# Altium PCB 2x3.PcbDoc
Units mil, origin at the board's own origin, x right, y up, seen from the top; angles counter-clockwise.
Board outline 3000 x 2000 mil, 2 copper layers (Top Layer, Bottom Layer); 32 components, 64 nets, 240 pads, 12 vias.
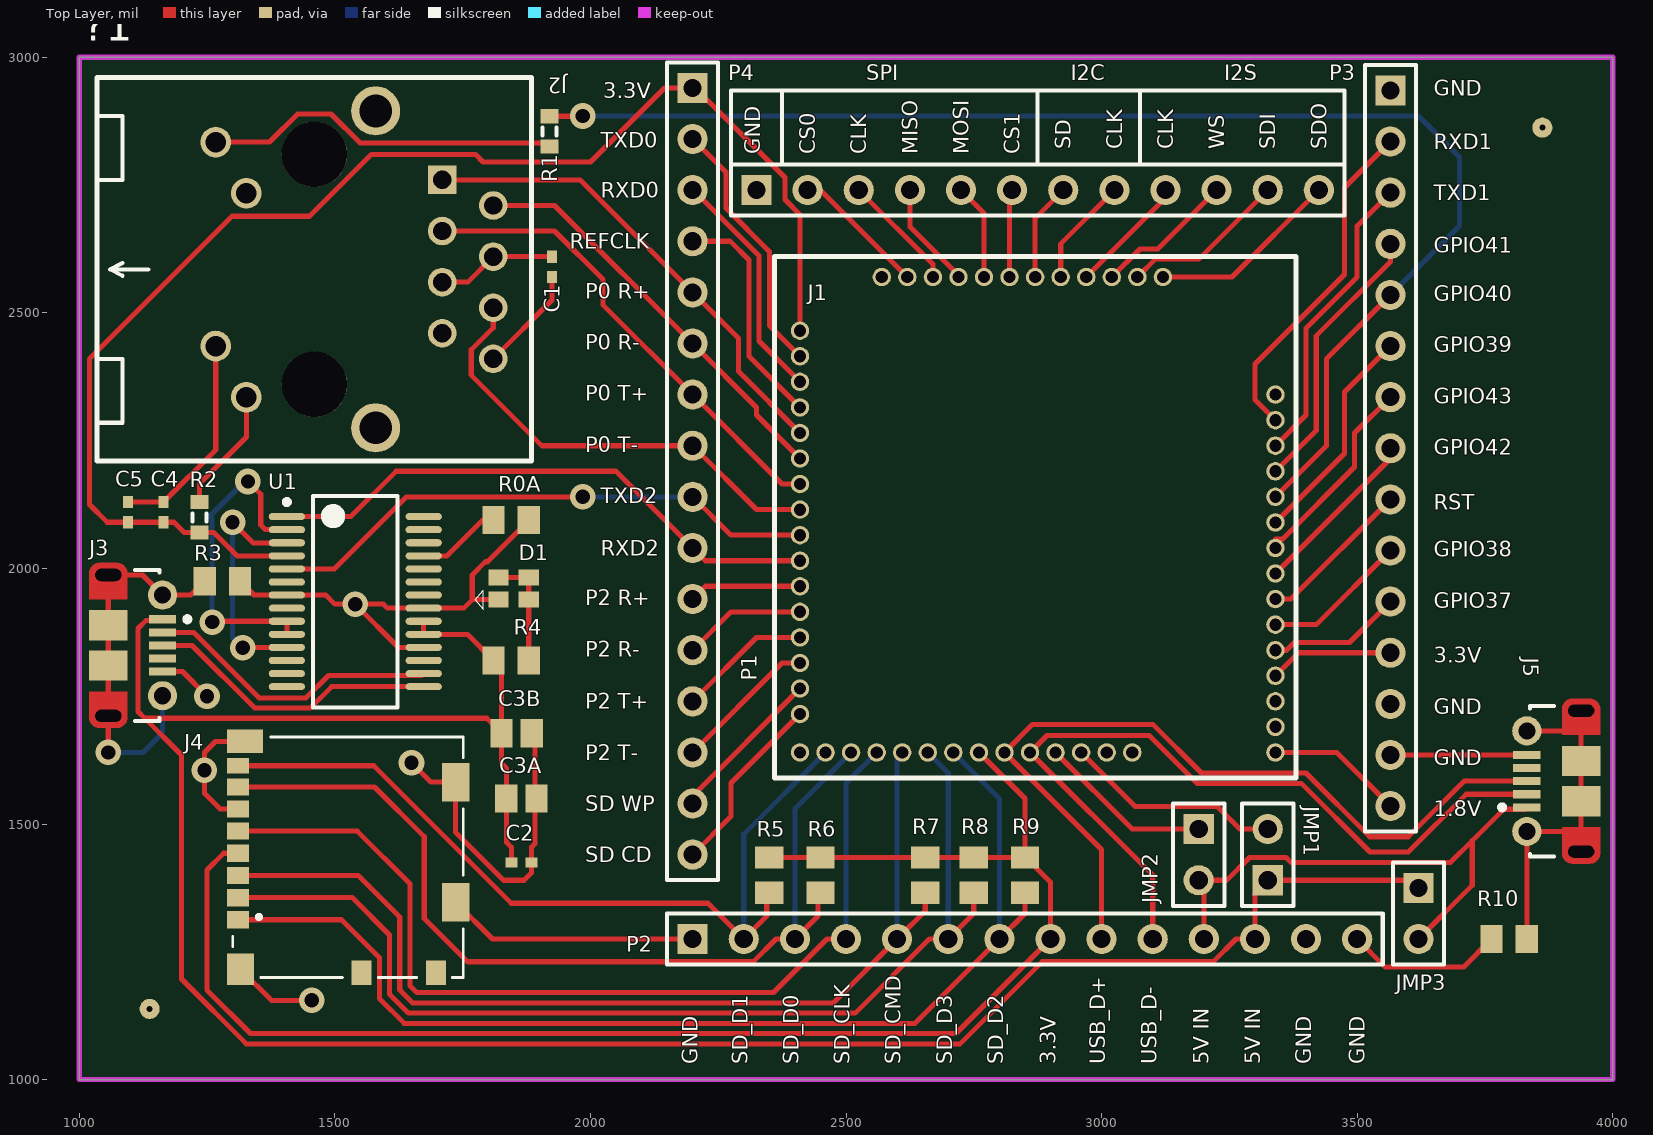
[diagram p0: Top Layer view]
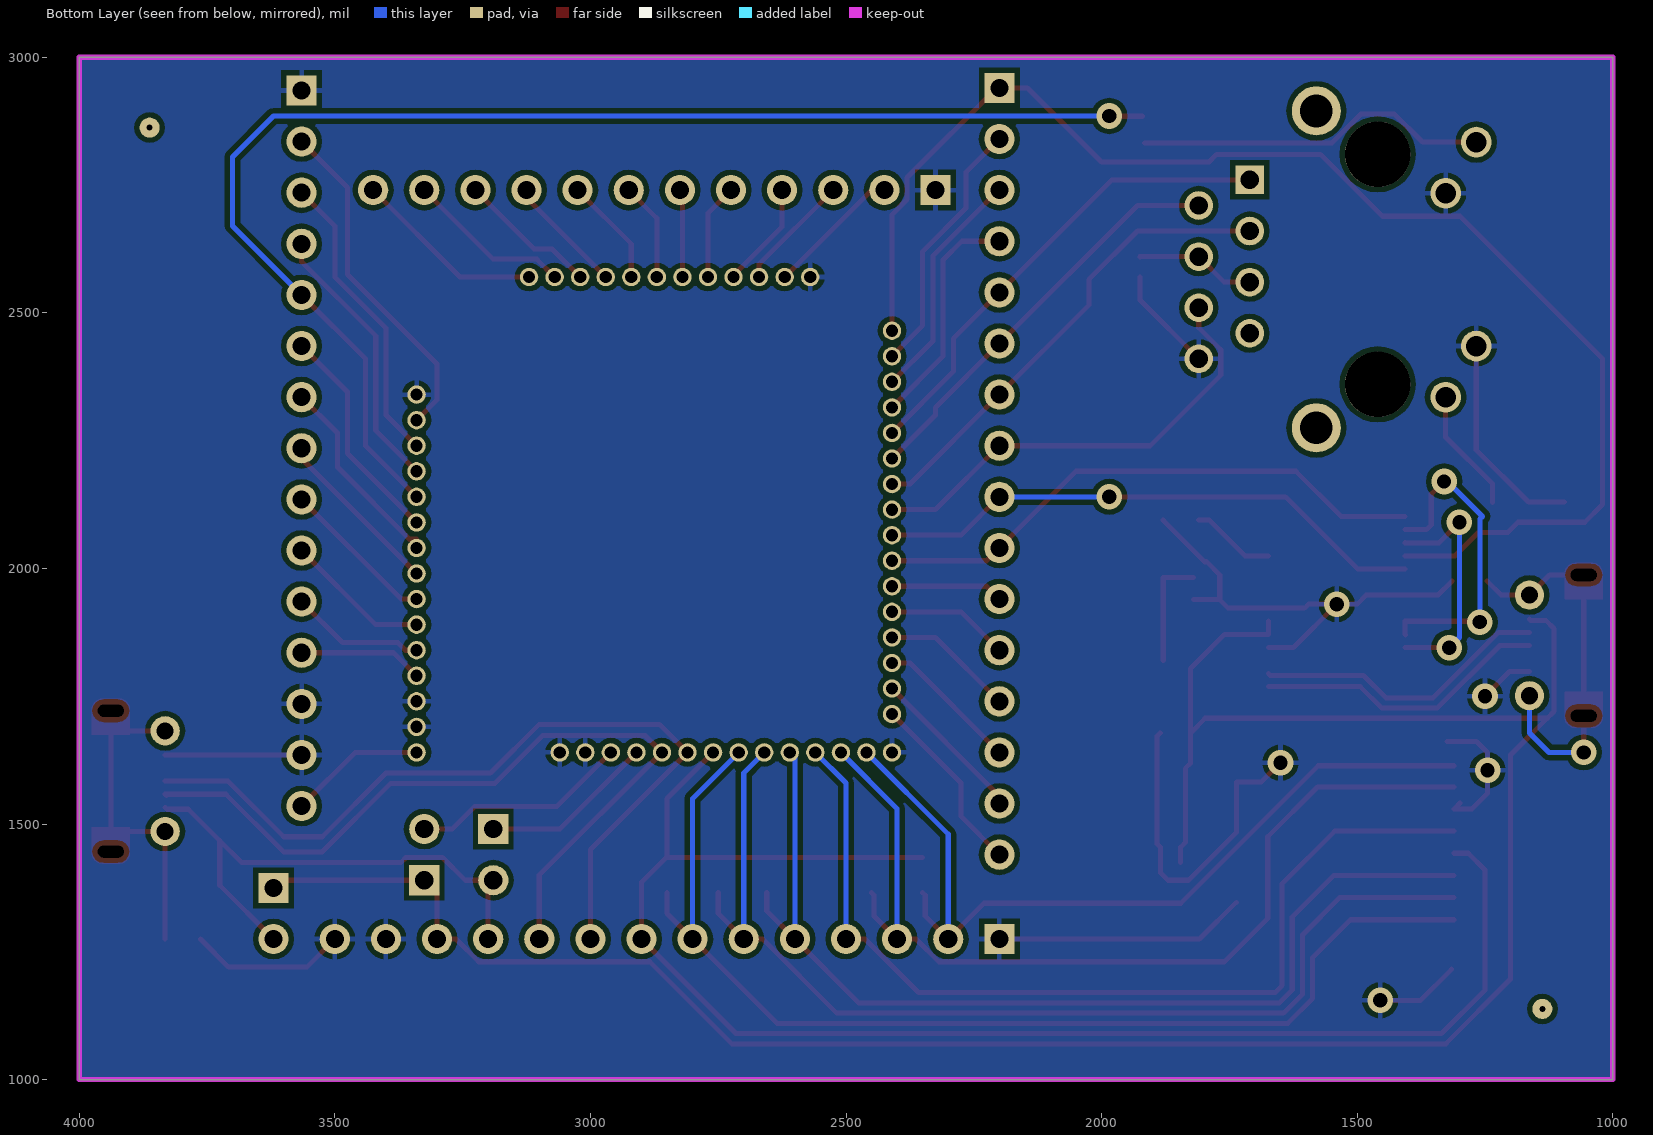
[diagram p1: Bottom Layer view, seen from below]

## Layer stack, top to bottom
Top Solder: solder mask 0.4, Solder Resist, Dk 3.5
Top Layer: signal copper 1.4
Dielectric 1: dielectric 12.6, FR-4, Dk 4.8
Bottom Layer: signal copper 1.4
Bottom Solder: solder mask 0.4, Solder Resist, Dk 3.5

## Board outline
1000,1000 1000,3000 4000,3000 4000,1000

## Design rules (kind name [scope] priority, off if disabled: settings)
Clearance [All] p1: gap=10 ignorepadtopadclearanceinfootprint=TRUE except(0: Arc-Hole Track-Hole SMDPad-Hole THPad-Hole Via-Hole Fill-Hole Poly-Hole Region-Hole Text-Hole; 20: Arc-Arc)
HoleSize [All] p1: absolutevalues=TRUE maxlimit=130 minlimit=1 maxpercent=80.000 minpercent=20.000
MinimumSolderMaskSliver "Inter Componetn_MinimumSolderMaskSliver" [(InComponent('U1') OR InComponent('J1') OR InComponent('J3') OR InComponent('D1') OR InComponent('J4') OR InComponent('J5') OR InComponent('C1') OR InComponent('C2') OR InComponent('C3A') OR InComponent('C3B') OR InComponent('C4') OR InComponent('C5')) vs (InComponent('U1') OR InComponent('J1') OR InComponent('J3') OR InComponent('D1') OR InComponent('J4') OR InComponent('J5') OR InComponent('C1') OR InComponent('C2') OR InComponent('C3A') OR InComponent('C3B') OR InComponent('C4') OR InComponent('C5'))] p1: minsoldermaskwidth=1
MinimumSolderMaskSliver [All] p2: minsoldermaskwidth=10
PolygonConnect [All] p1: connectstyle=Relief reliefconductorwidth=10 reliefentries=4 polygonreliefangle="90 Angle" airgapwidth=10
RoutingVias [All] p1: holewidth=28 width=50 viastyle="Through Hole" minholewidth=28 minwidth=50 maxholewidth=28 maxwidth=50
SilkToSolderMaskClearance SilkToSolderMaskClearance_1 [(InComponent('R1') OR InComponent('R2') OR InComponent('R3') OR InComponent('R4') OR InComponent('R5') OR InComponent('R6') OR InComponent('R7') OR InComponent('R8') OR InComponent('R9') OR InComponent('R10') OR InComponent('R0A') OR InComponent('D1') OR InComponent('J4')) vs (InComponent('R1') OR InComponent('R2') OR InComponent('R3') OR InComponent('R4') OR InComponent('R5') OR InComponent('R6') OR InComponent('R7') OR InComponent('R8') OR InComponent('R9') OR InComponent('R10') OR InComponent('R0A') OR InComponent('D1') OR InComponent('J4'))] p1: minsilkscreentomaskgap=3 clearancetoexposedcopper=TRUE
SilkToSolderMaskClearance [IsPad] p2: minsilkscreentomaskgap=10 clearancetoexposedcopper=TRUE
SolderMaskExpansion [All] p1: expansion=4
Width [All] p1: maxlimit=10 minlimit=10 preferedwidth=10
27 further rules are at their usual default settings.

## Components (designator, comment, footprint, x,y, rotation, side; value= is the part's Value field where it differs from the comment)
?1 "2X3_BOARD" 2X3_BOARD 1000,1000 r0 top locked
C1 "100nF" 0402 1925,2590 r270 top
C2 "100nF" 0402 1865,1425 r180 top
C3A "4.7uF" C0805 1865,1550 r0 top
C3B "4.7uF" C0805 1855.83,1677.66 r0 top
C4 "10nF" 0402 1165,2110 r270 top
C5 "100nF" 0402 1095,2110 r270 top
D1 "LED2" PLCC4-2MM-RGB 1849.92,1960.54 r180 top
J1 "Vocore2  Mount" "Vocore2_Mount_One_Row_ No_Labels" 2410,1596 r0 top
J2 "J0011D01BNL" J00-00XXNL_J00-0061NL(Primary) 1460,2585 r90 top
J3 "105017-0001" USB-MICRO-B_V#1 1110,1849.37 r270 top
J4 "104031-0811" MOLEX_104031-0811_104031-0811(Primary) 1515,1435 r270 top
J5 "105017-0001" USB-MICRO-B_V#2 3885,1583.82 r90 top
JMP1 "Header 2" HDR1X2 3325,1390 r90 top
JMP2 "Header 2" HDR1X2 3190,1490 r270 top
JMP3 "Header 2" HDR1X2 3620,1375 r270 top
P1 "Header 16" HDR1X16 2200,2940 r270 top
P2 "Header 14" HDR1X14 2200,1275 r0 top
P3 "Header 15" HDR1X15 3565,2935 r270 top
P4 "Header 12" HDR1X12 2325,2740 r0 top
R0A "0" RESC2013X06N 1845,2095 r180 top
R1 "330" J1-0603 1920,2855 r270 top
R2 "330" J1-0603 1235,2100 r90 top
R3 "100" RESC2013X06N 1280,1975 r0 top
R4 "100" RESC2013X06N 1845,1820.05 r0 top
R5 "10K" RESC2012X07N_0805 2350,1400 r90 top
R6 "10K" RESC2012X07N_0805 2450,1400 r90 top
R7 "10K" RESC2012X07N_0805 2655,1400 r90 top
R8 "10K" RESC2012X07N_0805 2750,1400 r90 top
R9 "10K" RESC2012X07N_0805 2850,1400 r90 top
R10 "100" RESC2013X06N 3797.4,1275 r180 top
U1 "FT232RL-Reel" SSOP-28_L 1540,1935 r0 top

## Footprints (in the part's own frame and the unit in brackets; to place one, negate y for a bottom-side part, rotate by r counter-clockwise, add the part's x,y. Pads: shape width x height; smd on the part's side, far side on the other; paste and mask are expansions set on the pad)
2X3_BOARD [mm]
  round 1 / inner round 1.524 / far side round 1 hole 0.3: P$1(3.5,3.51) P$2(72.7,47.3)
0402 [mm] "Chip Capacitor, Body 1.0x0.5mm, IPC High Density"
  rect 0.6x0.5 smd: 1(-0.5,0) 2(0.5,0)
  body extent -0.55,-0.3 0.55,0.3, height 1.3
C0805 [mm] "Chip Capacitor, Body 2.0x1.3mm, IPC High Density"
  rect 1.1x1.4 smd: 1(-0.75,0) 2(0.75,0)
  body extent -1.1,-0.72 1.1,0.72, height 1.4
HDR1X2 [mm] "Connector; Header; 2 Position"
  rect 1.5x1.5 hole 0.9: 1(0,0)
  round 1.5 hole 0.9: 2(2.54,0)
  silkscreen extent -1.27,-1.27 3.81,1.27
HDR1X12 [mm] "Connector; Header; 12 Position"
  rect 1.5x1.5 hole 0.9: 1(0,0)
  round 1.5 hole 0.9: 2(2.54,0) 3(5.08,0) 4(7.62,0) 5(10.16,0) 6(12.7,0) 7(15.24,0) 8(17.78,0) 9(20.32,0) 10(22.86,0) 11(25.4,0) 12(27.94,0)
  silkscreen extent -1.27,-1.27 29.21,1.27
HDR1X14 [mm] "Connector; Header; 14 Position"
  rect 1.5x1.5 hole 0.9: 1(0,0)
  round 1.5 hole 0.9: 2(2.54,0) 3(5.08,0) 4(7.62,0) 5(10.16,0) 6(12.7,0) 7(15.24,0) 8(17.78,0) 9(20.32,0) 10(22.86,0) 11(25.4,0) 12(27.94,0) 13(30.48,0) 14(33.02,0)
  silkscreen extent -1.27,-1.27 34.29,1.27
HDR1X15 [mm] "Connector; Header; 15 Position"
  rect 1.5x1.5 hole 0.9: 1(0,0)
  round 1.5 hole 0.9: 2(2.54,0) 3(5.08,0) 4(7.62,0) 5(10.16,0) 6(12.7,0) 7(15.24,0) 8(17.78,0) 9(20.32,0) 10(22.86,0) 11(25.4,0) 12(27.94,0) 13(30.48,0) 14(33.02,0) 15(35.56,0)
  silkscreen extent -1.27,-1.27 36.83,1.27
HDR1X16 [mm] "Connector; Header; 16 Position"
  rect 1.5x1.5 hole 0.9: 1(0,0)
  round 1.5 hole 0.9: 2(2.54,0) 3(5.08,0) 4(7.62,0) 5(10.16,0) 6(12.7,0) 7(15.24,0) 8(17.78,0) 9(20.32,0) 10(22.86,0) 11(25.4,0) 12(27.94,0) 13(30.48,0) 14(33.02,0) 15(35.56,0) 16(38.1,0)
  silkscreen extent -1.27,-1.27 39.37,1.27
J00-00XXNL_J00-0061NL(Primary) [mil]
  rect 56x56 hole 36: 1(175,-250)
  round 56 hole 36: 2(125,-350) 3(75,-250) 4(25,-350) 5(-25,-250) 6(-75,-350) 7(-125,-250) 8(-175,-350)
  round 60 hole 40: 9(249,193) 10(149,133) 11(-150,193) 12(-250,133)
  round 128 hole 128 unplated: None(-225,0) None(225,0)
  round 96 hole 64: S1(-310,-120) S2(310,-120)
  silkscreen extent -375,-425 375,425
J1-0603 [mm] "Chip Resistor, Body 1.6x0.8mm, IPC High Density"
  rect 0.7x0.9 smd: 1(-0.75,0) 2(0.75,0)
  silkscreen extent -0.2,-0.35 0.2,0.35, body extent -0.85,-0.48 0.85,0.48, height 0.9
MOLEX_104031-0811_104031-0811(Primary) [mm]
  rect 0.85x1.1 smd: 1(3.105,-5.2) 3(0.905,-5.2) 4(-0.195,-5.2) 5(-1.295,-5.2) 6(-2.395,-5.2) 7(-3.495,-5.2)
  rect 0.875x1.1 smd: 2(2.005,-5.2)
  rect 0.75x1.1 smd: 8(-4.545,-5.2)
  rect 1.2x1 smd: 9(5.74,0.95) 10(5.74,4.65)
  rect 1.55x1.35 smd: G1(5.565,-5.075)
  rect 1.17x1.8 smd: G2(-5.755,-4.85)
  rect 1.9x1.35 smd: G3(-3.73,5.625) G4(2.24,5.625)
  silkscreen extent -5.97,-5.45 5.97,6
PLCC4-2MM-RGB [mm]
  rect 1x0.8 smd: 1(-0.75,0.55) 1(-0.75,-0.55) 1(0.75,-0.55) 2(0.75,0.55)
  silkscreen extent 1.52,0.08 1.91,1.02
RESC2012X07N_0805 [mm] "Chip Resistor, 2-Leads, Body 2.00x1.22mm, IPC Medium Density"
  rect 1.1x1.4 smd: 1(-0.875,0) 2(0.875,0)
  body extent -1.07,-0.7 1.08,0.7, height 0.65
RESC2013X06N [mm] "Chip Resistor, 2-Leads, Body 2.00x1.27mm, IPC Medium Density"
  rect 1.1x1.4 smd: 1(-0.875,0) 2(0.875,0)
  body extent -1.07,-0.7 1.08,0.7, height 0.65
SSOP-28_L [mm] "SOP, 28-Leads, Body 10.2x5.3mm, Pitch 0.65mm, IPC High Density"
  oval 1.8x0.35 smd: 1(-3.4,4.225) 2(-3.4,3.575) 3(-3.4,2.925) 4(-3.4,2.275) 5(-3.4,1.625) 6(-3.4,0.975) 7(-3.4,0.325) 8(-3.4,-0.325) 9(-3.4,-0.975) 10(-3.4,-1.625) 11(-3.4,-2.275) 12(-3.4,-2.925) 13(-3.4,-3.575) 14(-3.4,-4.225) 15(3.4,-4.225) 16(3.4,-3.575) 17(3.4,-2.925) 18(3.4,-2.275) 19(3.4,-1.625) 20(3.4,-0.975) 21(3.4,-0.325) 22(3.4,0.325) 23(3.4,0.975) 24(3.4,1.625) 25(3.4,2.275) 26(3.4,2.925) 27(3.4,3.575) 28(3.4,4.225)
  silkscreen extent -3.52,-5.25 2.1,5.25, body extent -2.8,-5.25 2.8,5.25, height 2
USB-MICRO-B_V#1 [mm] "USB, MICRO B, Body 7.491x4.695 mm, Pitch 0.65 mm"
  rect 0.4x1.35 smd: 1(-1.3,1.35) 2(-0.65,1.35) 3(0,1.35) 4(0.65,1.35) 5(1.3,1.35)
  round 1.45 hole 0.85: 6(-2.5,1.35) 7(2.5,1.35)
  rrect50% 0x0 hole 0.6 slot 1.3 at 90 deg: 8(-3.5,-1.35) 11(3.5,-1.35)
  rect 1.5x1.9 smd: 9(-1,-1.35) 10(1,-1.35)
  Top Layer circle w0.5: c-3.6,-1.8 r0.25
  Top Layer circle w0.5: c3.6,-1.8 r0.25
  Top Layer region: -3.6,-1.8 -3.6,-0.9 -4.1,-0.9 -4.1,-1.8
  Top Layer region: 3.6,-0.9 3.6,-1.8 4.1,-1.8 4.1,-0.9
  Top Layer region: 2.3,-0.4 2.3,-2.3 3.6,-2.3 3.6,-0.4
  Top Layer region: -2.3,-2.3 -2.3,-0.4 -3.6,-0.4 -3.6,-2.3
  Top Layer lines w0.5: 3.546,-1.144 cw(c3.6,-0.9) 3.5,-1.129 cw(c3.6,-0.9) 3.5,-0.671 cw(c3.6,-0.9) 3.6,-0.65 cw(c3.6,-0.9) 3.546,-1.144 ; -3.5,-1.129 ccw(c-3.6,-0.9) -3.5,-0.671 ccw(c-3.6,-0.9) -3.6,-0.65 ccw(c-3.6,-0.9) -3.5,-1.129
  silkscreen extent -3.75,-0.01 3.75,2.7, body extent -4.1,-3.9 4.1,1.5, height 2.67
USB-MICRO-B_V#2 [mm] "USB, MICRO B, Body 7.491x4.695 mm, Pitch 0.65 mm"
  rect 0.4x1.35 smd: 1(-1.3,1.35) 2(-0.65,1.35) 3(0,1.35) 4(0.65,1.35) 5(1.3,1.35)
  round 1.45 hole 0.85: 6(-2.5,1.35) 7(2.5,1.35)
  rrect50% 0x0 hole 0.6 slot 1.3 at 90 deg: 8(-3.5,-1.35) 11(3.5,-1.35)
  rect 1.5x1.9 smd: 9(-1,-1.35) 10(1,-1.35)
  Top Layer circle w0.5: c-3.6,-1.8 r0.25
  Top Layer circle w0.5: c-3.6,-0.9 r0.25
  Top Layer circle w0.5: c3.6,-0.9 r0.25
  Top Layer region: -3.6,-1.8 -3.6,-0.9 -4.1,-0.9 -4.1,-1.8
  Top Layer region: 3.6,-0.9 3.6,-1.8 4.1,-1.8 4.1,-0.9
  Top Layer region: 2.3,-0.4 2.3,-2.3 3.6,-2.3 3.6,-0.4
  Top Layer region: -2.3,-2.3 -2.3,-0.4 -3.6,-0.4 -3.6,-2.3
  Top Layer lines w0.5: 3.546,-1.556 ccw(c3.6,-1.8) 3.6,-2.05 ccw(c3.6,-1.8) 3.546,-1.556
  silkscreen extent -3.75,-0.01 3.75,2.7, body extent -4.1,-3.9 4.1,1.5, height 2.67
"Vocore2_Mount_One_Row_ No_Labels" [mil]
  round 36 hole 24: 1(0,869) 2(0,819) 3(0,769) 4(0,719) 5(0,669) 6(0,619) 7(0,569) 8(0,519) 9(0,469) 10(0,419) 11(0,369) 12(0,319) 13(0,269) 14(0,219) 15(0,169) 16(0,119) 17(0,44) 18(50,44) 19(100,44) 20(150,44) 21(200,44) 22(250,44) 23(300,44) 24(350,44) 25(400,44) 26(450,44) 27(500,44) 28(550,44) 29(600,44) 30(650,44) 31(930,44) 32(930,94) 33(930,144) 34(930,194) 35(930,244) 36(930,294) 37(930,344) 38(930,394) 39(930,444) 40(930,494) 41(930,544) 42(930,594) 43(930,644) 44(930,694) 45(930,744) 46(710,974) 47(660,974) 48(610,974) 49(560,974) 50(510,974) 51(460,974) 52(410,974) 53(360,974) 54(310,974) 55(260,974) 56(210,974) 57(160,974)

## Part data
C1 C2 C4 C5: library part "Cap Semi", "Capacitor (Semiconductor SIM Model)", LatestRevisionDate=29-May-2009, LatestRevisionNote="IPC-7351 Footprint Added.", PackageDescription="Chip Capacitor", PackageReference=C1206, Published=8-Jun-2000, Publisher="Altium Limited"
C3A C3B: library part CMP-1036-04922-1, "CAP CER 4.7UF 6.3V X5R 0603", Manufacturer=Yageo, Manufacturer Part Number=CC0603KRX5R5BB475, Part Number=311-1521-1-ND, Supplier=Digikey, URL=https://www.digikey.com/short/q3j4jd
D1: "Typical RED, GREEN, YELLOW, AMBER GaAs LED", LatestRevisionDate=17-Jul-2002, LatestRevisionNote="Re-released for DXP Platform.", PackageDescription="SM LED; 2 Flat Leads", PackageReference=3.2X1.6X1.1, PackageVersion=Feb-2002, Published=8-Jun-2000, Publisher="Altium Limited"
J1: library part Vocore2_Pins
J2: "CONN MAGJACK 1PORT 100 BASE-TX", Manufacturer="Pulse Electronics Network", Supplier Part Number 1=553-1483-ND, Manufacturer Part Number=J0011D01BNL, Supplier 1=Digi-Key, URL=https://www.digikey.com/short/q8f3j9
J3 J5: library part CMP-2000-05827-1, "Micro-USB B Receptacle, Right Angle, Bottom Mount, Surface Mount, with Solder Tabs, -30 to 85 degC, 5-Pin USB, RoHS, Tape and Reel", Manufacturer=Molex, Package Description="5-Leads USB, Micro B, Body 7.5 x 5 mm, Pitch 0.65 mm", Package Reference=MICRO-B, Package Version="Rev. F, 12/2012", Standard Package=1, Voltage - Max=30V, 3D Model=105017-0001.stp, Catalog Drawings=1050170001, Category=Connectors,Interconnects, Circuits=5, Connector Type=USB-microB, Datasheet URL=http://www.molex.com/elqNow/elqRedir.htm?ref=http://www.molex.com/webdocs/datasheets/pdf/en-us/1050170001_IO_CONNECTORS.pdf, Datasheet Version=03/2016, Family=USB,DVI,HDMIConnectors, Featured Product=Micro-USBConnectorsUSBConnectors, Features=Shielded,SolderRetention, Gender=Receptacle, Ingress Protection=-, Manufacturer URL=http://www.molex.com/, Mating Products=WM17145-ND-CABLEMICROUSBBTOSTDA1.0MWM17147-ND-CABLEMICROUSBBTOSTDA2.0MWM17146-ND-CABLEMICROUSBBTOSTDA1.5M, Mounting Technology=SurfaceMount, Mounting Type=BoardCutout,SurfaceMount,RightAngle, Number of Contacts=5, Online Catalog=Molex-MicroUSB, Other Names=WM1399DKR, Package URL=http://www.molex.com/pdm_docs/sd/1050170001_sd.pdf, Packaging=Digi-Reel®, PCN Assembly/Origin=ResinSupplier21/Oct/2015, RoHS Information=1050170001CertofCompliance, Series=-, Specifications=-
J4: "1.10mm Pitch microSD Memory Card Connector, SMT, Push-Pull Type, 1.42mm Height, with Detect Switch", Manufacturer=Molex, Supplier Part Number 1=WM6357CT-ND, Manufacturer Part Number=104031-0811, Part Number=104031-0811, Supplier=Arrow, Supplier 1=Digi-Key, URL=https://www.arrow.com/en/products/1040310811/molex?utm_source=octopart&utm_medium=aggregator&utm_campaign=octopart_2017&utm_content=inv_listing&utm_keyword=1040310811
JMP1 JMP2 JMP3: "Header, 2-Pin", LatestRevisionDate=17-Jul-2002, LatestRevisionNote="Re-released for DXP Platform.", Publisher="Altium Limited"
P1: "Header, 16-Pin", LatestRevisionDate=17-Jul-2002, LatestRevisionNote="Re-released for DXP Platform.", Publisher="Altium Limited"
P2: "Header, 14-Pin", LatestRevisionDate=17-Jul-2002, LatestRevisionNote="Re-released for DXP Platform.", Publisher="Altium Limited"
P3: "Header, 15-Pin", LatestRevisionDate=17-Jul-2002, LatestRevisionNote="Re-released for DXP Platform.", Publisher="Altium Limited"
P4: "Header, 12-Pin", LatestRevisionDate=17-Jul-2002, LatestRevisionNote="Re-released for DXP Platform.", Publisher="Altium Limited"
R0A R1 R2 R3 R4 R5 R6 R7 R8 R9 R10: library part Res3, "Resistor", LatestRevisionDate=29-May-2009, LatestRevisionNote="IPC-7351 Footprint Added.", PackageDescription="Chip Resistor", PackageReference=J1-0603, Published=8-Jun-2000, Publisher="Altium Limited"
U1: library part CMP-0078-00029-3, "USB UART Asynchronous Serial Data Transfer Chip, 28-pin SSOP, Tape and Reel", Manufacturer=FTDI, ComponentLink1Description="Manufacturer URL", ComponentLink1URL=http://www.ftdichip.com/, ComponentLink2Description=Datasheet, ComponentLink2URL=http://www.ftdichip.com/Support/Documents/DataSheets/ICs/DS_FT232R.pdf, DatasheetVersion="ver 2.10, Mar-2012", PackageDescription="28-Pin Small Outline Package 0.65 mm Pitch", PackageReference=SSOP-28, PackageVersion=Mar-12, PartNumber=FT232RL-Reel, RevisionNote="DatasheetVersion updated to 2.10 Mar-2012"
?1: DeviceSetName=2X3_BOARD, GateName_1=G$1, LibraryName=voltera_EAGLE_community_lib, Package=2X3_BOARD, SymbolName_1=VIAS

## Via types
v1: diameter 50, hole 28, Top Layer to Bottom Layer, 12 vias

## Nets (pads, with @x,y where several pads share a name; then routed paths per layer and width w, separated by ;. In a path a pad name is that pad's centre, name@x,y a point inside that pad or via, vN(x,y) a via of type N, cw(c..) or ccw(c..) an arc to the next point about the centre after c; other vN are vias at no path point)
3V3_L: C4.2 C5.2 J1.1 P1.1 R2.1 U1.4 | length 2689.8
  Top Layer w10: U1.4 1308.86,2024.57 1262.96,2070.47 R2.1 1205.47,2070.47 1185.63,2090.31 C4.2 C5.2 1054.69,2090.31 1020,2125 1020,2410 1299,2689 1450.72,2689 1571.72,2810 1775,2810 1790,2795 2000,2795 2145,2940 P1.1 2205.27,2940 2380.47,2764.8 2380.47,2721.56 2410,2692.03 J1.1
3V3B: J1.24 J4.4 P2.8 R5.2 R6.2 R7.2 R8.2 R9.2 | length 2994.5
  Top Layer w10: J4.4 1282.68,1442.68 1250,1410 1250,1175 1335,1090 2715,1090 P2.8 2900,1385.98 2851.53,1434.45 R9.2 ; R5.2 R6.2 R7.2 R8.2 R9.2 ; J1.24 2850,1550 R9.2
5V_IN: J5.1 JMP2.2 JMP3.2 P2.11 | length 1063.8
  Top Layer w10: P2.11 3200,1380 JMP2.2 3244.73,1390 3289.26,1434.53 3360.74,1434.53 3370.27,1425 3682.69,1425 3725,1467.31 ; JMP3.2 3725,1380 3725,1467.31 ; J5.1 3828.15,1528.94 3786.63,1528.94 3725,1467.31
GND: C1.2 C2.1 C3A.2 C3B.2 C4.1 C5.1 D1.2 J1.17 J1.29 J1.30 J1.32 J1.33 J1.45 J1.57 J2.8 J2.10 J2.11 J3.5 J4.6 J4.G1 J4.G2 J4.G3 J4.G4 J5.5 P2.1 P2.13 P2.14 P3.1 P3.13 P3.14 P4.1 R0A.1 R3.2 R10.2 U1.7 U1.18 U1.21 | length 3808.2
  Top Layer w10: C5.1 C4.1 1267,2231.68 J2.11 ; J3.5 1201.81,1798.19 v1(1250,1750) ; J4.6@1298.7,1540.87 J4.6 1275.71,1529.29 1245,1560 v1(1245,1605) 1245,1640 1266.57,1661.57 J4.G2 ; R3.2 1341.65,1947.8 U1.7 1482.2,1947.8 1500,1930 v1(1540,1930) ; J4.G1 1376.1,1155 v1(1455,1155) ; v1(1650,1620) 1688.15,1581.85 J4.G3 1736.46,1483.54 1830,1390 1870,1390 1884.68,1404.68 C2.1 1884.68,1454.68 1891.26,1461.26 1891.26,1530.35 1891.26,1671.76 C3B.2 ; U1.18 1624.57,1845.43 v1(1540,1930) ; J4.G4 1808.27,1275 P2.1 ; J2.8 1925,2525 C1.2 ; D1.2 1768.89,1938.89 ; R0A.1 1879.45,2093.47 1798.92,2012.94 1794.5,2012.94 1768.89,1987.34 1768.89,1938.89 ; P2.14 3555,1220 3707.95,1220 R10.2 ; P3.14 J5.5 ; v1(1540,1930) 1595,1930 1602.8,1922.2 U1.21 1752.2,1922.2 1768.89,1938.89
LED_CTRL: J1.41 P3.5 R1.1 | length 2627.4
  Top Layer w10: R1.1 1984.53,2884.53 v1(1985,2885) ; J1.41 3440,2240 3440,2410 P3.5
  Bottom Layer w10: v1(1985,2885) 3620,2885 3700,2805 3700,2670 P3.5
NetC1_1: C1.1 J2.4 J2.5 | length 235.8
  Top Layer w10: J2.5 1760,2560 J2.4 1924.69,2610 C1.1
NetD1_1: D1.1 R4.2 | length 221.2
  Top Layer w10: D1.1@1820.39,1982.2 1879.45,1982.2 1879.45,1938.89 R4.2
NetJ1_27: J1.27 JMP2.1 | length 342.1
  Top Layer w10: J1.27 3060,1490 JMP2.1
NetJ1_28: J1.28 JMP1.2 | length 427.1
  Top Layer w10: J1.28 3065.47,1534.53 3225.74,1534.53 3270.27,1490 JMP1.2
NetJ1_31: J1.31 P3.15 | length 268.5
  Top Layer w10: J1.31 3460,1640 P3.15
NetJ1_34: J1.34 P3.12 | length 243.6
  Top Layer w10: J1.34 3385,1835 P3.12
NetJ1_35: J1.35 P3.11 | length 264.4
  Top Layer w10: J1.35 3361.72,1840 3376.72,1855 3485,1855 P3.11
NetJ1_36: J1.36 P3.10 | length 285.1
  Top Layer w10: J1.36 3420,1890 P3.10
NetJ1_37: J1.37 P3.9 | length 305.8
  Top Layer w10: J1.37 3370,1940 P3.9
NetJ1_38: J1.38 P3.8 | length 338.2
  Top Layer w10: J1.38 3565,2215 P3.8
NetJ1_39: J1.39 P3.7 | length 396.2
  Top Layer w10: J1.39 3340,2057 3353.67,2057 3495,2198.33 3495,2265 P3.7
NetJ1_40: J1.40 P3.6 | length 438.2
  Top Layer w10: J1.40 3475,2225 3475,2345 P3.6
NetJ1_42: J1.42 P3.4 | length 538.2
  Top Layer w10: J1.42 3420,2270 3420,2455 3565,2600 P3.4
NetJ1_43: J1.43 P3.3 | length 588.2
  Top Layer w10: J1.43 3400,2300 3400,2470 3500,2570 3500,2670 P3.3
NetJ1_44: J1.44 P3.2 | length 671.3
  Top Layer w10: J1.44 3300,2330 3300,2400 3475,2575 3475,2745 P3.2
NetJ1_46: J1.46 P4.12 | length 375.4
  Top Layer w10: J1.46 3255,2570 P4.12
NetJ1_47: J1.47 P4.11 | length 325.4
  Top Layer w10: J1.47 3105,2605 3190,2605 P4.11
NetJ1_48: J1.48 P4.10 | length 275.4
  Top Layer w10: J1.48 3075,2625 3110,2625 P4.10
NetJ1_49: J1.49 P4.9 | length 234.2
  Top Layer w10: J1.49 3125,2725 P4.9
NetJ1_50: J1.50 P4.8 | length 213.5
  Top Layer w10: J1.50 2920,2635 P4.8
NetJ1_51: J1.51 P4.7 | length 192.8
  Top Layer w10: J1.51 2870,2685 P4.7
NetJ1_52: J1.52 P4.6 | length 172.1
  Top Layer w10: J1.52 2820,2735 P4.6
NetJ1_53: J1.53 P4.5 | length 188.6
  Top Layer w10: P4.5 2770,2695 J1.53
NetJ1_54: J1.54 P4.4 | length 209.4
  Top Layer w10: P4.4 2625,2668.28 2720,2573.28 J1.54
NetJ1_55: J1.55 P4.3 | length 230.1
  Top Layer w10: P4.3 2670,2595 J1.55
NetJ1_56: J1.56 P4.2 | length 265.4
  Top Layer w10: P4.2 2450,2740 J1.56
NetJ2_9: J2.9 R1.2 | length 694.9
  Top Layer w10: J2.9 1372.28,2834 1427.28,2889 1492.72,2889 1549.72,2832 R1.2@1915.47,2832
NetJ2_12: J2.12 R2.2 | length 243.6
  Top Layer w10: R2.2 1235,2165 1327,2257 J2.12
NetJ3_2: J3.2 U1.16 | length 583.5
  Top Layer w10: J3.2 1223.47,1874.96 1351.66,1746.77 1443.75,1746.77 1487.53,1790.55 1670.16,1790.55 U1.16
NetJ3_3: J3.3 U1.15 | length 578.8
  Top Layer w10: J3.3 1220.78,1849.37 1343.38,1726.77 1452.04,1726.77 1493.93,1768.66 U1.15
NetJ3_6: J3.6 J3.7 J3.8 J3.9 J3.10 J3.11 R3.1 | length 783.2
  Top Layer w10: v1(1056.85,1640) J3.11 1065.55,1711.57 1083.59,1711.57 ; J3.11@1060,1714.73 1056.85,1717.88 J3.10 J3.9 J3.8 1065.55,1987.17 1083.59,1987.17 1123.78,1987.17 J3.6 1218.35,1947.8 R3.1
  Bottom Layer w10: v1(1056.85,1640) 1125,1640 1163.15,1678.15 J3.7
NetJ5_6: J5.6 J5.7 J5.8 J5.9 J5.10 J5.11 R10.1 | length 719.5
  Top Layer w10: R10.1 J5.6 3912.76,1485.39 J5.8@3938.15,1460 ; J5.7 3925.39,1682.24 3938.15,1695 ; J5.8 J5.8@3938.15,1460 ; J5.11@3946.26,1723.42 3938.15,1715.31 3938.15,1695 ; J5.8@3938.15,1460 J5.9 J5.10 3938.15,1695
NetR0A_2: R0A.2 U1.25 | length 165.9
  Top Layer w10: U1.25 1719.57,2024.57 1790,2095 R0A.2
NetU1_2: U1.2 U1.9 U1.10 | length 636.2
  Top Layer w10: v1(1260,1895) 1261.61,1896.61 U1.9 U1.10 U1.10@1405.12,1870 ; v1(1330,2170) 1355,2145 1355,2085 1364.25,2075.75 U1.2
  Bottom Layer w10: v1(1260,1895) 1260,2096.57 1255,2101.57 1323.43,2170 v1(1330,2170)
NetU1_3: U1.3 U1.11 | length 462.4
  Top Layer w10: v1(1300,2090) 1340,2050 1405.98,2050 U1.3 ; v1(1320,1845) 1405.71,1845 U1.11
  Bottom Layer w10: v1(1300,2090) 1300,1865 v1(1320,1845)
P0_R+: J1.5 J2.1 P1.5 | length 943.1
  Top Layer w10: J2.1 1980,2760 P1.5 2290,2450 2290,2385 J1.5
P0_R-: J1.6 J2.2 P1.6 | length 813.8
  Top Layer w10: J2.2 1930,2710 P1.6 2325,2315 2325,2300 J1.6
P0_T+: J1.7 J2.3 P1.7 | length 934.3
  Top Layer w10: J2.3 1930,2660 2025,2565 2025,2515 P1.7 2375,2165 J1.7
P0_T-: J1.8 J2.6 P1.8 | length 901.7
  Top Layer w10: J2.6 1810,2470.81 1767,2427.81 1767,2378 1905,2240 P1.8 2325,2115 J1.8
P2_R+: J1.11 P1.11 | length 220.4
  Top Layer w10: P1.11 2225,1965 J1.11
P2_R-: J1.12 P1.12 | length 241.1
  Top Layer w10: P1.12 2275,1915 J1.12
P2_T+: J1.13 P1.13 | length 261.8
  Top Layer w10: P1.13 2325,1865 J1.13
P2_T-: J1.14 P1.14 | length 282.5
  Top Layer w10: P1.14 2375,1815 J1.14
REFCLK: J1.4 P1.4 | length 455
  Top Layer w10: P1.4 2273.43,2640 2310,2603.43 2310,2415 J1.4
RXD0: J1.3 P1.3 | length 463
  Top Layer w10: P1.3 2201.72,2740 2330,2611.72 2330,2445 J1.3
RXD2: J1.10 P1.10 U1.1 | length 1113.1
  Top Layer w10: U1.1 1531.34,2101.34 1620,2190 2050,2190 P1.10 2225,2015 J1.10
SD0: J1.18 J4.8 P2.2 R5.1 | length 1672.7
  Top Layer w10: J4.8 1576.06,1613.94 1845,1345 2230,1345 P2.2 2345,1320 2345,1360.55 R5.1
  Bottom Layer w10: P2.2 2300,1480 J1.18
SD1: J1.19 J4.7 P2.3 R6.1 | length 1865.4
  Top Layer w10: J4.7 1577.4,1572.6 1675,1475 1675,1315 1759.53,1230.47 2318.44,1230.47 2362.97,1275 P2.3 2445,1320 2445,1360.55 R6.1
  Bottom Layer w10: P2.3 2400,1530 J1.19
SD2: J1.20 J4.5 P2.4 | length 1870.3
  Top Layer w10: J4.5 1544.02,1485.98 1647.09,1382.91 1647.09,1183.7 1660.39,1170.39 2358.37,1170.39 2462.97,1275 P2.4
  Bottom Layer w10: P2.4 2500,1580 J1.20
SD3: J1.21 J4.3 P2.5 R7.1 | length 2010.7
  Top Layer w10: J4.3 1545.63,1399.37 1627.09,1317.91 1627.09,1175.42 1652.5,1150 2475,1150 P2.5 2655,1330 R7.1
  Bottom Layer w10: P2.5 2600,1630 J1.21
SD4: J1.22 J4.2 P2.6 R8.1 | length 2104.1
  Top Layer w10: J4.2 1533.94,1356.06 1607.09,1282.91 1607.09,1167.13 1644.22,1130 2517.97,1130 2662.97,1275 P2.6 2750,1325 R8.1
  Bottom Layer w10: J1.22 2700,1600 P2.6
SD5: J1.23 J4.1 P2.7 R9.1 | length 2202.5
  Top Layer w10: J4.1 1513.18,1312.76 1587.09,1238.85 1587.09,1158.85 1635.93,1110 2635,1110 P2.7 2850,1325 R9.1
  Bottom Layer w10: J1.23 2800,1550 P2.7
SD_CD: J1.16 P1.16 | length 362
  Top Layer w10: P1.16 2275,1515 2275,1580 J1.16
SD_WP: J1.15 P1.15 | length 312
  Top Layer w10: P1.15 2200,1555 J1.15
TXD0: J1.2 P1.2 | length 512
  Top Layer w10: P1.2 2265,2775 2265,2705 2350,2620 2350,2475 J1.2
TXD2: J1.9 P1.9 U1.5 | length 1093.3
  Top Layer w10: U1.5 1498.98,1998.98 1640,2140 v1(1985,2140) ; P1.9 2275,2065 J1.9
  Bottom Layer w10: v1(1985,2140) P1.9
USB0: J1.25 J5.3 P2.9 | length 1624.5
  Top Layer w10: P2.9 3000,1450 J1.25 2865,1695 3100,1695 3195.47,1599.53 3400,1599.53 3524.53,1475 3600,1475 3708.82,1583.82 J5.3
USB1: J1.26 J5.2 P2.10 | length 1595.1
  Top Layer w10: P2.10 3100,1400 J1.26 2893,1673 3093,1673 3186.47,1579.53 3390.47,1579.53 3525,1445 3600,1445 3713.23,1558.23 J5.2 J5.2@3829.13,1555.51
VBUS: C2.2 C3A.1 C3B.1 J3.1 JMP1.1 JMP3.1 P2.12 R4.1 U1.19 U1.20 | length 4743.6
  Top Layer w10: J3.1 1160.43,1897.83 1130.36,1897.83 1115,1882.47 1115,1720 1128.23,1706.77 ; U1.20 U1.19 1759.58,1871.02 R4.1 1826.3,1804.31 C3B.1 ; C2.2 1845.31,1454.69 1836.14,1463.86 1836.14,1530.35 1836.14,1608.86 1826.3,1618.7 C3B.1 ; JMP3.1 3605,1390 JMP1.1 3300,1365 P2.12 3262.97,1275 3218.44,1230.47 2883.76,1230.47 2723.28,1070 1326.72,1070 1200,1196.72 1200,1635 1128.23,1706.77 ; 1128.23,1706.77 1797.19,1706.77 C3B.1
pads on no net: ?1.P$1 ?1.P$2 J2.7 J2.None J2.S1 J2.S2 J3.4 J4.9 J4.10 J5.4 U1.6 U1.8 U1.12 U1.13 U1.14 U1.17 U1.22 U1.23 U1.24 U1.26 U1.27 U1.28

## Polygon pours and split planes (outlines as drawn)
GND on Bottom Layer "Bottom Layer-No Net" (solid, remove dead copper, pour order 10): 1000,1000 1000,3000 4000,3000 4000,1000

## Keep-outs
Keep-Out Layer:
  the board outline again, w10

## Silkscreen, mask and mechanical layers (free items; w line width, h text height)
Top Overlay:
  lines w7.87: 2275,2790 2275,2935 2875,2935 ; 2375,2790 2375,2935 ; 2875,2790 2875,2935 ; 3075,2790 3075,2935 ; 3475,2790 3475,2935 2875,2935
  lines w10: 2360,1590 2360,2610 3380,2610 3380,1590 2360,1590
  text "SPI" at 2540,2955 h30
  text "I2C" at 2940,2955 h30
  text "I2S" at 3240,2955 h30
  text "GND" at 3650,2925 h30
  text "3.3V" at 2024.98,2920 h30
  text "TXD0" at 2019.98,2822.5 h30
  text "SD" at 2940,2820 h30 r90
  text "CLK" at 3040,2820 h30 r90
  text "CLK" at 3140,2820 h30 r90
  text "WS" at 3240,2820 h30 r90
  text "SDI" at 3340,2820 h30 r90
  text "SDO" at 3440,2820 h30 r90
  text "RXD1" at 3650,2820 h30
  text "GND" at 2332.5,2810 h30 r90
  text "CS0" at 2440,2810 h30 r90
  text "CLK" at 2540,2810 h30 r90
  text "MISO" at 2640,2810 h30 r90
  text "MOSI" at 2740,2810 h30 r90
  text "CS1" at 2840,2810 h30 r90
  text "RXD0" at 2019.98,2725 h30
  text "TXD1" at 3650,2720 h30
  text "REFCLK" at 1960,2625 h30
  text "GPIO41" at 3650,2617.5 h30
  text "P0 R+" at 1989.99,2527.5 h30
  text "GPIO40" at 3650,2522.5 h30
  text "P0 R-" at 1989.99,2427.5 h30
  text "GPIO39" at 3650,2422.5 h30
  text "P0 T+" at 1989.99,2327.5 h30
  text "GPIO43" at 3650,2322.5 h30
  text "P0 T-" at 1989.99,2227.5 h30
  text "GPIO42" at 3650,2222.5 h30
  text "TXD2" at 2019.98,2127.5 h30
  text "RST" at 3650,2115 h30
  text "RXD2" at 2019.98,2025 h30
  text "GPIO38" at 3650,2022.5 h30
  text "P2 R+" at 1989.99,1927.5 h30
  text "GPIO37" at 3650,1922.5 h30
  text "P2 R-" at 1989.99,1827.5 h30
  text "3.3V" at 3650,1815 h30
  text "P2 T+" at 1989.99,1725 h30
  text "GND" at 3650,1715 h30
  text "P2 T-" at 1989.99,1625 h30
  text "GND" at 3650,1615 h30
  text "SD WP" at 1989.99,1525 h30
  text "1.8V" at 3650,1515 h30
  text "SD CD" at 1989.99,1425 h30
  text "GND" at 2210,1030 h30 r90
  text "SD_D1" at 2307.5,1030 h30 r90
  text "SD_D0" at 2407.5,1030 h30 r90
  text "SD_CLK" at 2507.5,1030 h30 r90
  text "SD_CMD" at 2607.5,1030 h30 r90
  text "SD_D3" at 2707.5,1030 h30 r90
  text "SD_D2" at 2807.5,1030 h30 r90
  text "3.3V" at 2910,1030 h30 r90
  text "USB_D+" at 3007.5,1030 h30 r90
  text "USB_D-" at 3107.5,1030 h30 r90
  text "5V IN" at 3210,1030 h30 r90
  text "5V IN" at 3310,1030 h30 r90
  text "GND" at 3410,1030 h30 r90
  text "GND" at 3515,1030 h30 r90